# Altium PCB ESP8266_Amp_THT.PcbDoc
Units mm, origin at the board's own origin, x right, y up, seen from the top; angles counter-clockwise.
Board outline 36.07 x 55.75 mm, 2 copper layers (Top Layer, Bottom Layer); 26 components, 25 nets, 90 pads, 19 vias.
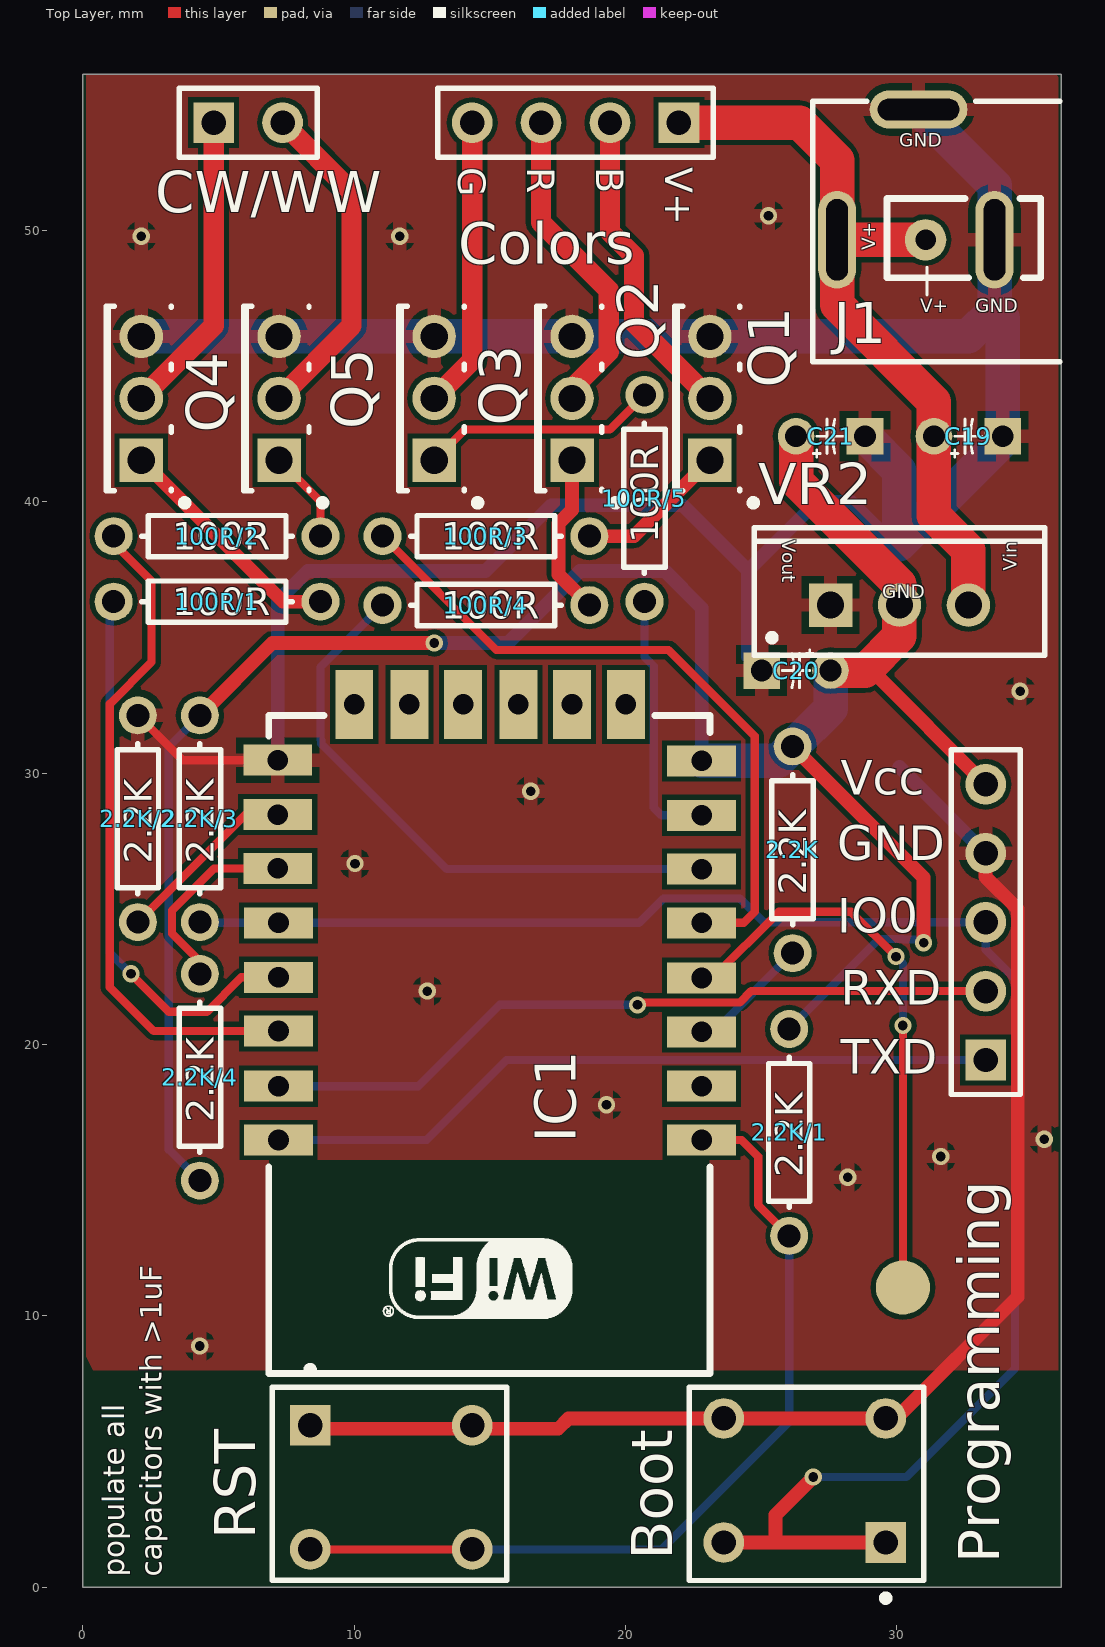
[diagram p0: Top Layer view]
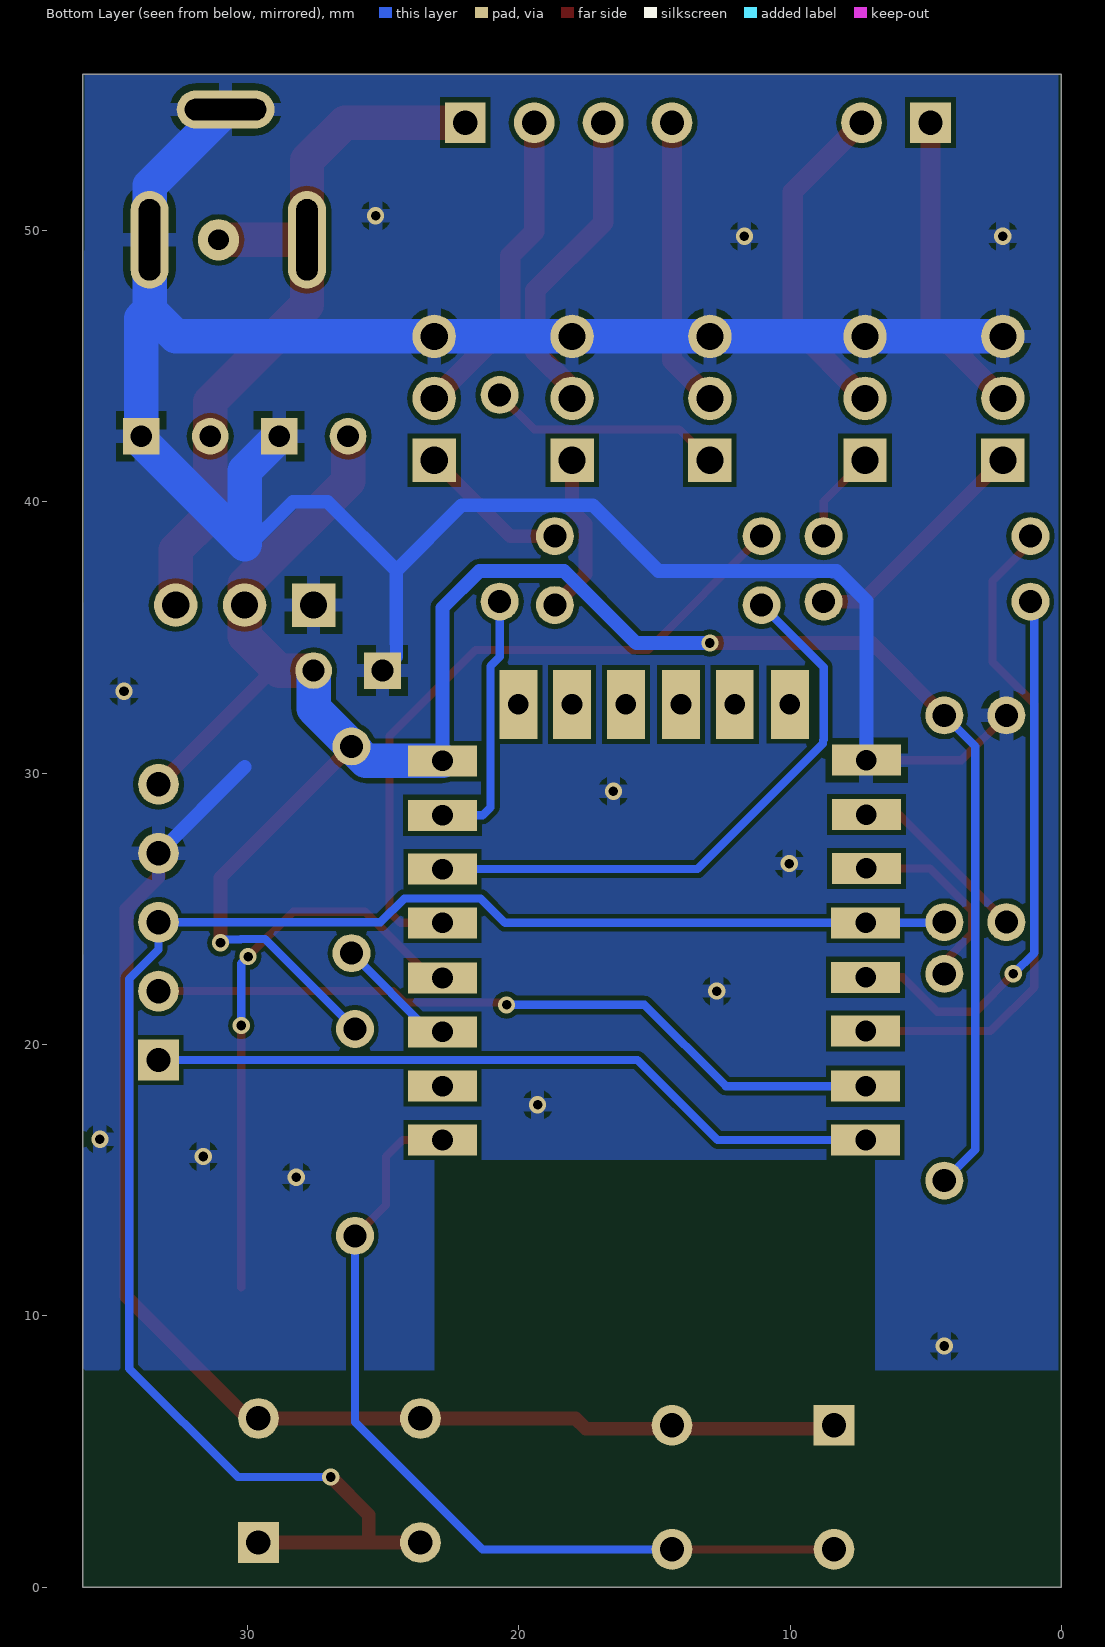
[diagram p1: Bottom Layer view, seen from below]

## Layer stack, top to bottom
Top Solder: solder mask 0.0102, Solder Resist, Dk 3.5
Top Layer: signal copper 0.0356
Dielectric 1: dielectric 0.32, FR-4, Dk 4.8
Bottom Layer: signal copper 0.0356
Bottom Solder: solder mask 0.0102, Solder Resist, Dk 3.5

## Board outline
0,0 0,55.753 36.068,55.753 36.068,0

## Design rules (kind name [scope] priority, off if disabled: settings)
Clearance [All] p1: gap=0.178
PolygonConnect [All] p1: connectstyle=Relief reliefconductorwidth=0.508 reliefentries=4 polygonreliefangle="90 Angle" airgapwidth=0.254
RoutingVias [All] p1: holewidth=0.356 width=0.635 viastyle="Through Hole" minholewidth=0.356 minwidth=0.635 maxholewidth=0.356 maxwidth=0.635
SolderMaskExpansion [All] p1: expansion=0.102
Width [All] p1: maxlimit=10 minlimit=0.254 preferedwidth=0.254 minimp=50.000000 maximp=50.000000 favimp=50.000000
29 further rules are at their usual default settings.

## Components (designator, comment, footprint, x,y, rotation, side; value= is the part's Value field where it differs from the comment)
2.2K "Res" Res-1/4W 26.162,27.178 r90 top
2.2K/1 "Res" Res-1/4W 26.035,16.764 r90 top
2.2K/2 "Res" Res-1/4W 2.032,28.321 r270 top
2.2K/3 "Res" Res-1/4W 4.318,28.321 r270 top
2.2K/4 "Res" Res-1/4W 4.318,18.796 r90 top
100R/1 "Res" Res-1/4W 4.953,36.322 r180 top
100R/2 "Res" Res-1/4W 4.953,38.735 r180 top
100R/3 "Res" Res-1/4W 14.859,38.735 r180 top
100R/4 "Res" Res-1/4W 14.859,36.195 r180 top
100R/5 "Res" Res-1/4W 20.701,40.132 r270 top
Boot "Tactile Switch" Tactile-SW 29.591,1.651 r180 top
C19 "Cap Pol" CAPR-2.54mm 32.639,42.418 r180 top
C20 "Cap Pol" CAPR-2.54mm 26.289,33.782 r0 top
C21 "Cap Pol" CAPR-2.54mm 27.559,42.418 r180 top
Colors "Header 4" HDR1X4 21.971,53.975 r180 top
CW/WW "Header 2" HDR1X2 4.826,53.975 r0 top
IC1 "ESP8266 ESP-12-E" "ESP8266 ESP-12-E" 6.223,32.893 r180 top
J1 "12V_DC_Jack" 694106301002 41.402,49.657 r180 top
Programming "Header 5" HDR1X5 33.274,19.431 r90 top
Q1 "IRLU024N" TO-251AA 23.114,43.815 r90 top
Q2 "IRLU024N" TO-251AA 18.034,43.815 r90 top
Q3 "IRLU024N" TO-251AA 12.954,43.815 r90 top
Q4 "IRLU024N" TO-251AA 2.159,43.815 r90 top
Q5 "IRLU024N" TO-251AA 7.239,43.815 r90 top
RST "Tactile Switch" Tactile-SW 8.382,5.969 r0 top
VR2 "VoltageRegulator_G/O/I" TO-220AB 30.099,36.195 r0 top

## Footprints (in the part's own frame and the unit in brackets; to place one, negate y for a bottom-side part, rotate by r counter-clockwise, add the part's x,y. Pads: shape width x height; smd on the part's side, far side on the other; paste and mask are expansions set on the pad)
694106301002 [mm] "WR-DC_DC Power Jack_Right Angled_THT Center Pin ?2.0_Plug ID ?2.05_Plug OD ?5.5"
  oval 1.4x3.6 hole 0.8 slot 3 at 90 deg: 1(13.6,0) 2(7.8,0)
  oval 3.6x1.4 hole 0.8 slot 3 at 0 deg: 3(10.6,-4.8)
  silkscreen extent 5.4,-5.1 14.5,4.5
CAPR-2.54mm [mm] "Capacitor; 2 Leads"
  rect 1.35x1.35 hole 0.8: 1(-1.27,0)
  round 1.35 hole 0.8: 2(1.27,0)
  silkscreen extent -0.51,-0.64 0.63,0.76
"ESP8266 ESP-12-E" [mil] "ESP8266 ESP-12-E"
  rect 100x45 hole 30: 1(-653,646) 2(-653,568) 3(-653,489) 4(-653,411) 5(-653,331) 6(-653,253) 7(-653,175) 8(-653,96) 15(-38,95) 16(-38,174) 17(-38,252) 18(-39,331) 19(-39,410) 20(-39,488) 21(-39,568) 22(-39,646)
  rect 55x100 hole 30: 9(-543,14) 10(-465,14) 11(-387,14) 12(-307,14) 13(-229,14) 14(-149,14)
  silkscreen extent -665,30 -25,985, body extent -661,37 -31,981, height 86
HDR1X2 [mm] "Connector; Header; 2 Position"
  rect 1.5x1.5 hole 0.9: 1(0,0)
  round 1.5 hole 0.9: 2(2.54,0)
  silkscreen extent -1.27,-1.27 3.81,1.27
HDR1X4 [mm] "Connector; Header; 4 Position"
  rect 1.5x1.5 hole 0.9: 1(0,0)
  round 1.5 hole 0.9: 2(2.54,0) 3(5.08,0) 4(7.62,0)
  silkscreen extent -1.27,-1.27 8.89,1.27
HDR1X5 [mm] "Connector; Header; 5 Position"
  rect 1.5x1.5 hole 0.9: 1(0,0)
  round 1.5 hole 0.9: 2(2.54,0) 3(5.08,0) 4(7.62,0) 5(10.16,0)
  silkscreen extent -1.27,-1.27 11.43,1.27
Res-1/4W [mm] "Axial Device, Thru-Hole; 2 Leads; 0.3 in Pin Spacing"
  round 1.4 hole 0.85: 1(-3.81,0) 2(3.81,0)
  silkscreen extent -2.77,-0.76 2.77,0.76
Tactile-SW [mm] "Photosensitive Diode; 2 Leads"
  rect 1.5x1.5 hole 0.9: 1(0,0)
  round 1.5 hole 0.9: 2(5.969,0) 3(0,-4.572) 4(5.969,-4.572)
  silkscreen extent -1.4,-5.71 7.24,2.17
TO-220AB [mm] "TO, Thru-Hole, Vertical, Heatsink Mounted; 3 In-Line Leads; Pitch 2.54 mm"
  rect 1.6x1.6 hole 1: 1(-2.54,0)
  round 1.6 hole 1: 2(0,0) 3(2.54,0)
  silkscreen extent -5.35,-1.85 5.35,2.85, body extent -5.4,-1.9 5.4,2.9, height 19.3
TO-251AA [mm] "TO, Thru-Hole, Vertical, Heatsink Mounted; 3 In-Line Leads; Pitch 2.28 mm"
  rect 1.6x1.6 hole 1: 1(-2.28,0)
  round 1.6 hole 1: 2(0,0) 3(2.28,0)
  silkscreen extent -3.97,-1.73 3.4,1.3, body extent -3.45,-1.15 3.45,1.35, height 9.7

## Part data
2.2K 2.2K/1 2.2K/2 2.2K/3 2.2K/4 100R/1 100R/2 100R/3 100R/4 100R/5: "Resistor"
Boot RST: library part Tact_SW
C19 C20 C21: "Polarized Capacitor (Axial)"
Colors: "Header, 4-Pin"
CW/WW: "Header, 2-Pin"
J1: "WR-DC DC Power Jack Right Angled(6.4)"
Programming: "Header, 5-Pin"
Q1 Q2 Q3 Q4 Q5: "HEXFET Power MOSFET"
VR2: "Voltage Regulator"

## Free pads (board coordinates)
  round 2 smd: 0(30.226,11.049)
  round 1.524 hole 0.762: 1(31.062,49.657)

## Via types
v1: diameter 0.635, hole 0.356, Top Layer to Bottom Layer, 19 vias

## Nets (pads, with @x,y where several pads share a name; then routed paths per layer and width w, separated by ;. In a path a pad name is that pad's centre, name@x,y a point inside that pad or via, vN(x,y) a via of type N, cw(c..) or ccw(c..) an arc to the next point about the centre after c; other vN are vias at no path point)
GND: 2.2K/2.1 Boot.3 Boot.4 C19.1 C20.1 C21.1 IC1.15 J1.2 J1.3 Programming.4 Q1.3 Q2.3 Q3.3 Q4.3 Q5.3 RST.1 RST.2 VR2.1 | length 147.7
  Top Layer w0.305: 2.2K/2.1 3.683,30.48 IC1.15
  Top Layer w0.508: RST.1@8.128,5.842 17.526,5.842 17.907,6.223 Boot.4 Boot.3 29.972,6.223 34.456,10.707 34.456,25.001 33.274,26.182 Programming.4
  Bottom Layer w0.508: IC1.15 7.188,36.348 8.294,37.454 14.848,37.454 17.272,39.878 22.098,39.878 24.511,37.465 ; C20.1 24.511,34.29 24.511,37.465 ; 30.099,30.226 Programming.4 ; 30.099,38.227 28.321,40.005 27.051,40.005 24.511,37.465
  Bottom Layer w1.27: Q4.3 Q5.3 Q3.3 Q2.3 Q1.3 32.633,46.095 33.602,47.064 ; C21.1 30.099,41.148 30.099,38.436 33.909,42.246 C19.1 33.909,46.757 33.602,47.064 ; J1.3 33.602,51.657 J1.2 33.602,47.064
  other v1: 4.318,8.89 28.194,15.113 31.623,15.875 35.433,16.51 19.304,17.78 12.7,21.971 10.033,26.67 16.51,29.337 34.544,33.02 2.159,49.784 11.684,49.784 25.273,50.546
IO0: 2.2K/3.2 Boot.1 Boot.2 IC1.18 Programming.3 | length 64.9
  Top Layer w0.508: Boot.2@23.495,1.651 25.527,1.651 ; v1(26.924,4.064) 25.527,2.667 25.527,1.651 ; Boot.1@29.718,1.651 25.527,1.651
  Bottom Layer w0.305: 2.2K/3.2 4.343,24.486 IC1.18 20.501,24.486 21.402,25.387 24.216,25.387 25.092,24.511 Programming.3 33.274,23.499 34.354,22.418 34.354,8.065 30.353,4.064 v1(26.924,4.064)
IO4: 100R/1.1 Q4.1 | length 9.2
  Top Layer w0.508: Q4.1@2.159,41.148 Q4.1 7.372,36.322 100R/1.1
IO5: 100R/2.1 Q5.1 | length 3.4
  Top Layer w0.305: Q5.1 8.763,40.011 100R/2.1
Net2.2K/1_1: 2.2K/1.1 IC1.1 RST.3 RST.4 | length 32.4
  Top Layer w0.305: RST.3 RST.4 ; IC1.1 24.282,16.485 24.892,15.875 24.892,14.097 2.2K/1.1 2.2K/1.1@25.781,12.954
  Bottom Layer w0.305: RST.4 21.336,1.397 26.035,6.096 2.2K/1.1
Net2.2K/2_2: 2.2K/2.2 IC1.16 | length 6.8
  Top Layer w0.305: 2.2K/2.2 5.994,28.473 IC1.16
Net2.2K/4_2: 2.2K/4.2 IC1.17 | length 7.3
  Top Layer w0.305: 2.2K/4.2 4.318,23.054 3.288,24.084 3.288,24.938 4.842,26.492 IC1.17
Net2.2K_1: 2.2K.1 IC1.3 | length 4.6
  Bottom Layer w0.305: IC1.3 23.266,20.472 2.2K.1
Net100R/1_2: 100R/1.2 IC1.19 | length 20.6
  Top Layer w0.305: v1(1.778,22.606) 3.175,21.209 4.572,21.209 5.842,22.479 IC1.19
  Bottom Layer w0.305: 100R/1.2 1.002,36.181 1.002,23.382 v1(1.778,22.606)
Net100R/2_2: 100R/2.2 IC1.20 | length 24.7
  Top Layer w0.305: 100R/2.2 1.143,38.481 2.54,37.084 2.54,34.096 1.002,32.558 1.002,22.112 2.616,20.498 IC1.20
Net100R/3_1: 100R/3.1 Q1.1 | length 5.6
  Top Layer w0.508: 100R/3.1 20.314,38.735 Q1.1
Net100R/3_2: 100R/3.2 IC1.5 | length 25.4
  Top Layer w0.305: 100R/3.2 15.24,34.544 21.59,34.544 24.765,31.369 24.765,24.892 24.359,24.486 IC1.5
Net100R/4_1: 100R/4.1 Q2.1 | length 6
  Top Layer w0.508: Q2.1 18.034,39.701 17.537,39.204 17.537,37.327 100R/4.1
Net100R/4_2: 100R/4.2 IC1.6 | length 22
  Bottom Layer w0.305: 100R/4.2 8.763,33.909 8.763,31.239 8.788,31.214 8.788,31.09 13.411,26.467 IC1.6
Net100R/5_1: 100R/5.1 Q3.1 | length 8.7
  Top Layer w0.305: Q3.1 14.084,42.665 19.424,42.665 100R/5.1
Net100R/5_2: 100R/5.2 IC1.7 | length 9.6
  Bottom Layer w0.305: 100R/5.2 20.701,34.287 21.044,33.944 21.044,28.74 21.336,28.448 IC1.7
NetC19_2: C19.2 Colors.1 J1.1 pad.1 VR2.3 | length 28.1
  Top Layer w1.27: Colors.1 26.416,53.975 27.802,52.589 J1.1 ; pad.1 J1.1 ; VR2.3 32.639,38.227 31.369,39.497 C19.2 31.369,43.688 27.802,47.255 J1.1
NetColors_2: Colors.2 Q1.2 | length 11.7
  Top Layer w0.75: Colors.2 19.431,49.948 20.315,49.064 20.315,46.614 Q1.2
NetColors_3: Colors.3 Q2.2 | length 12
  Top Layer w0.635: Colors.3 Colors.3@17.043,53.823
  Top Layer w0.75: Colors.3 16.891,50.292 19.387,47.796 19.387,45.535 18.034,44.182 Q2.2
NetColors_4: Colors.4 Q3.2 | length 10.7
  Top Layer w0.75: Q3.2 14.351,45.212 Colors.4
NetCW/WW_1: CW/WW.1 Q4.2 | length 11.3
  Top Layer w0.75: Q4.2 4.826,46.482 CW/WW.1
NetCW/WW_2: CW/WW.2 Q5.2 | length 12.3
  Top Layer w0.75: Q5.2 9.906,46.482 9.906,51.435 CW/WW.2
RXD: IC1.21 Programming.2 | length 27.5
  Top Layer w0.305: v1(20.447,21.463) 20.536,21.552 24.216,21.552 24.635,21.971 Programming.2
  Bottom Layer w0.305: IC1.21 12.37,18.466 15.367,21.463 v1(20.447,21.463)
TXD: IC1.22 Programming.1 | length 27.3
  Bottom Layer w0.305: IC1.22 12.675,16.485 15.621,19.431 Programming.1
VCC33: 2.2K.2 2.2K/1.2 2.2K/3.1 2.2K/4.1 C20.2 C21.2 IC1.8 Programming.5 VR2.2 | length 85.8
  Top Layer w0.508: 2.2K/3.1 6.985,34.798 v1(12.954,34.798) ; 2.2K.2 30.988,26.162 v1(30.988,23.749) ; 28.829,33.782 29.083,33.782 Programming.5
  Top Layer w1.27: C21.2 26.289,40.767 30.099,36.957 VR2.2 30.099,35.052 28.829,33.782 C20.2
  Bottom Layer w0.305: 2.2K/4.1 3.175,16.129 3.175,30.988 2.2K/3.1 ; 2.2K/1.2 29.35,23.889 30.24,23.889 30.253,23.876 30.861,23.876 v1(30.988,23.749)
  Bottom Layer w0.508: v1(12.954,34.798) 15.671,34.798 18.327,37.454 21.452,37.454 22.809,36.096 IC1.8
  Bottom Layer w1.27: IC1.8 25.629,30.455 2.2K.2 27.559,32.385 C20.2
pads on no net: IC1.2 IC1.4 IC1.9 IC1.10 IC1.11 IC1.12 IC1.13 IC1.14
copper on no net: | length 21.2
  Top Layer w0.305: 22.809,22.454 23.216,22.454 25.654,24.892 28.321,24.892 v1(29.972,23.241) ; 30.226,11.049 v1(30.226,20.701)
  Bottom Layer w0.305: v1(29.972,23.241) 30.226,22.987 v1(30.226,20.701)

## Polygon pours and split planes (outlines as drawn)
GND on Top Layer "Bottom Layer-No Net" (solid, pour order 16): 0.127,55.753 35.992,55.753 35.941,55.653 35.941,8.001 0.381,8.001 0.127,8.501
GND on Bottom Layer "Bottom Layer-No Net" (solid, pour order 20): 35.992,55.753 0.127,55.753 0.127,8.001 36.068,8.001

## Other copper
Top Layer:
  pour cut-out: 6.858,15.748 23.114,15.748 23.114,7.874 6.858,7.874
Bottom Layer:
  pour cut-out: 6.858,15.748 23.114,15.748 23.114,7.874 6.858,7.874

## Silkscreen, mask and mechanical layers (free items; w line width, h text height)
Top Overlay:
  lines w0.1: 31.115,47.625 31.115,48.641
  lines w0.254: 32.512,51.181 30.226,51.181 29.635,51.181 29.635,48.26 32.639,48.26 ; 34.544,51.181 35.306,51.181 35.306,48.26 34.671,48.26
  text "G" at 13.843,52.324 h1.02 r270
  text "R" at 16.383,52.324 h1.02 r270
  text "B" at 18.923,52.324 h1.02 r270
  text "V+" at 21.463,52.324 h1.02 r270
  text "V+" at 30.861,46.99 h0.5
  text "Vout" at 25.781,38.608 h0.5 r270
  text "100R" at 21.209,38.481 h1.02 r90
  text "100R" at 3.302,38.227 h1.02
  text "100R" at 13.208,38.227 h1.02
  text "Vin" at 34.417,37.465 h0.5 r90
  text "GND" at 29.464,36.449 h0.5
  text "100R" at 3.302,35.814 h1.02
  text "100R" at 13.208,35.687 h1.02
  text "Vcc" at 27.94,29.21 h1.27
  text "GND" at 27.813,26.797 h1.27
  text "2.2K" at 2.54,26.67 h1.02 r90
  text "2.2K" at 4.826,26.67 h1.02 r90
  text "2.2K" at 26.67,25.527 h1.02 r90
  text "IO0" at 27.813,24.13 h1.27
  text "RXD" at 27.94,21.463 h1.27
  text "TXD" at 27.94,18.923 h1.27
  text "2.2K" at 4.826,17.145 h1.02 r90
  text "2.2K" at 26.543,15.113 h1.02 r90
  text "populate all" at 1.524,0.381 h0.8 r90
  text "capacitors with >1uF" at 2.921,0.381 h0.8 r90
Mechanical 1:
  the board outline again, w0.254

## Text inside footprints (layer, text, board x,y; h text height)
IC1: Mechanical 13 "CUTOUT POLYGON" at 22.808,9.002 h0.25 r180; Mechanical 13 "ANTENNA AREA" at 22.808,8.494 h0.25 r180
J1: Top Overlay "V+" at 29.21,49.276 h0.5 r90; Top Overlay "GND" at 32.893,46.99 h0.5; Top Overlay "GND" at 30.099,53.086 h0.5